# Altium PCB LED.PcbDoc
Units mm, origin at the board's own origin, x right, y up, seen from the top; angles counter-clockwise.
Board outline 18 x 18.5 mm, 2 copper layers (Top Layer, Bottom Layer), stack 1.671 mm thick; 5 components, 4 nets, 10 pads, 1 vias.
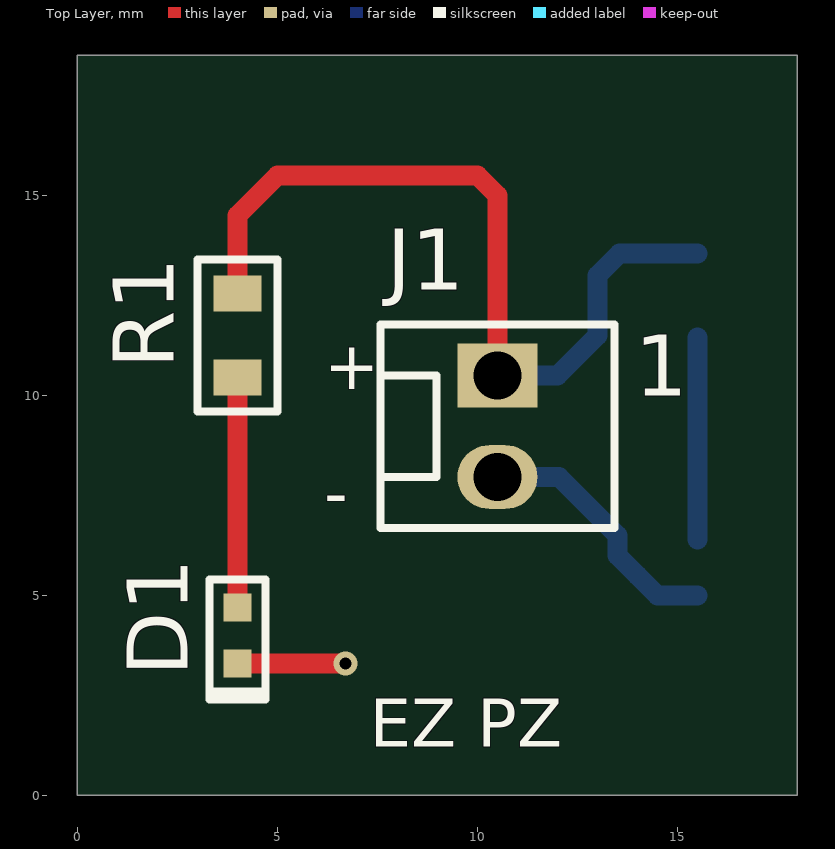
[diagram p0: Top Layer view]
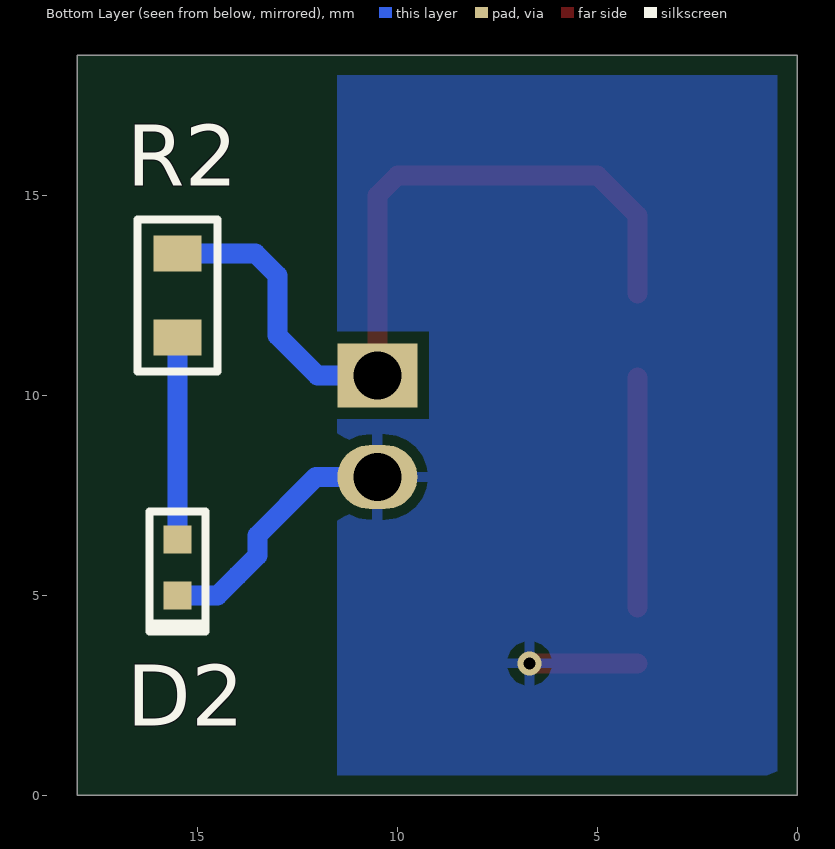
[diagram p1: Bottom Layer view, seen from below]
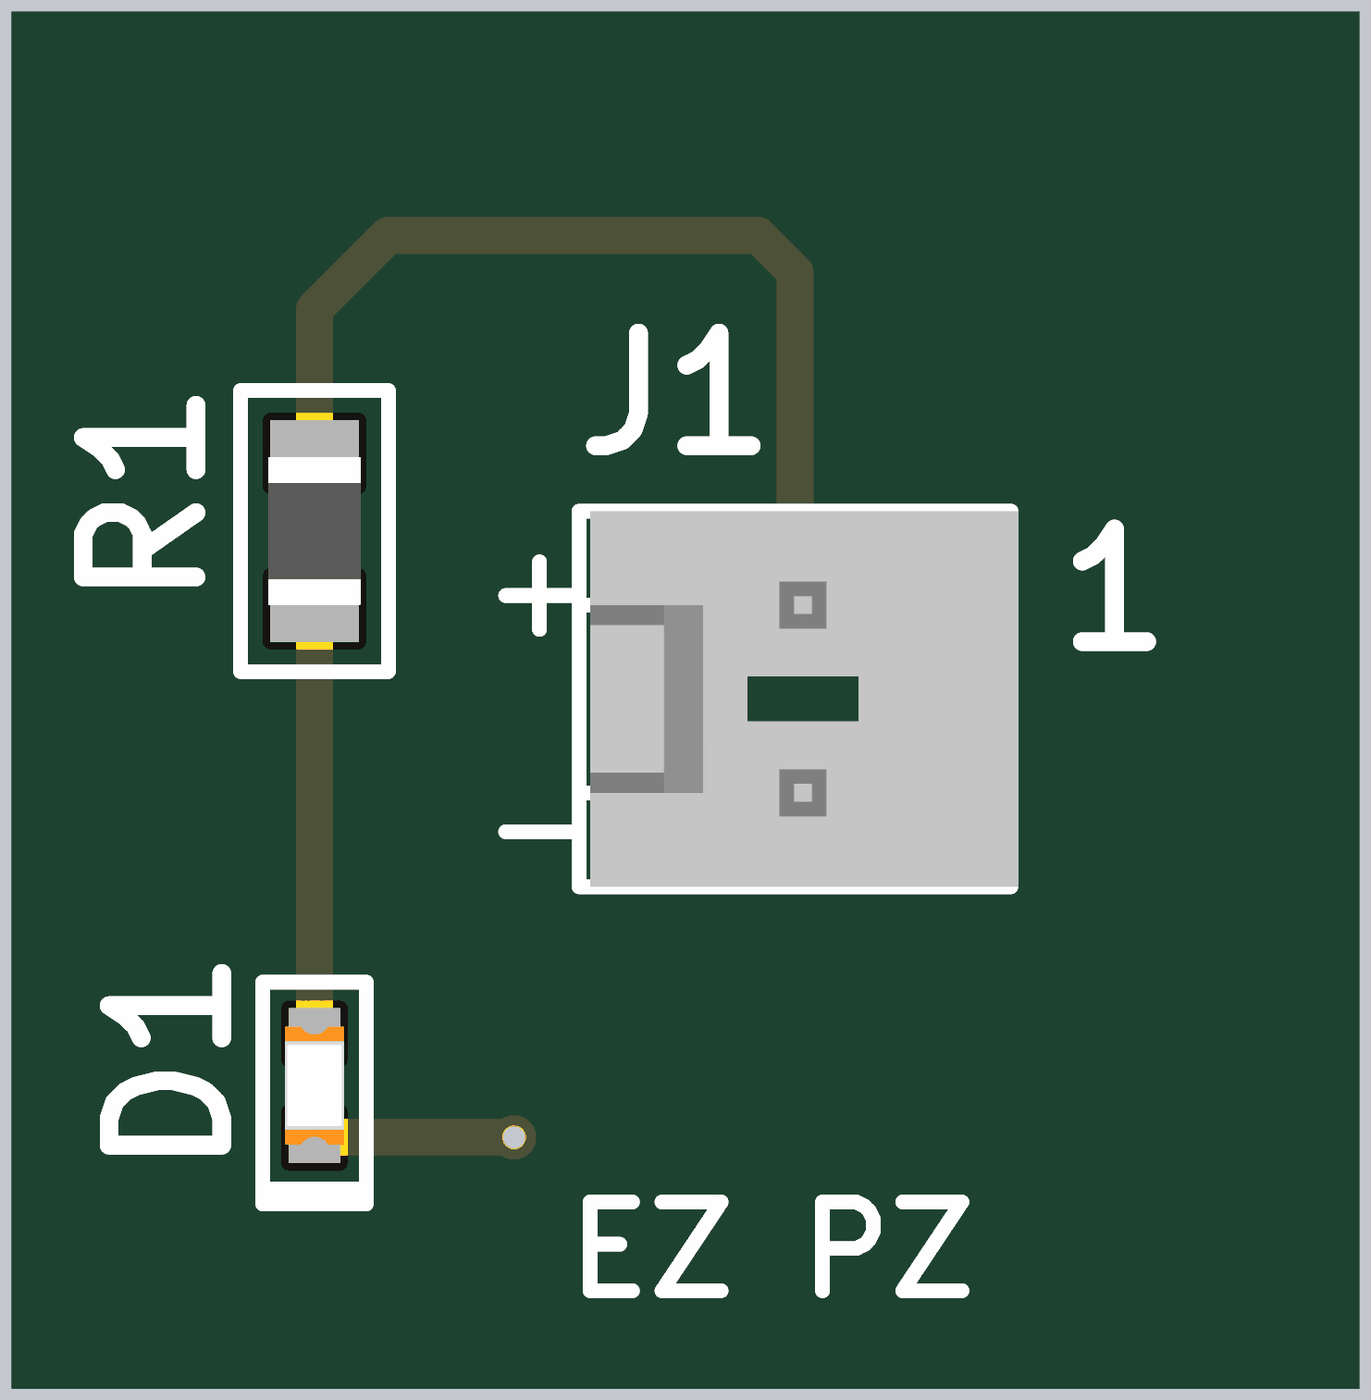
[diagram p2: 3D render of the assembled board from above, using the file's embedded part models]

## Layer stack, top to bottom
Top Solder: solder mask 0.0102, Solder Resist, Dk 3.5
Top Layer: signal copper 0.0356
Dielectric 1: dielectric 1.6, FR-4, Dk 4.8
Bottom Layer: signal copper 0.0356
Bottom Solder: solder mask 0.0102, Solder Resist, Dk 3.5

## Board outline
0,0 18,0 18,18.5 0,18.5

## Design rules (kind name [scope] priority, off if disabled: settings)
Clearance [All] p1: gap=0.3 ignorepadtopadclearanceinfootprint=FALSE
PolygonConnect [All] p1: connectstyle=Relief reliefconductorwidth=0.254 reliefentries=4 polygonreliefangle="90 Angle" airgapwidth=0.254
RoutingVias [All] p1: holewidth=0.3 width=0.6 viastyle="Through Hole" minholewidth=0.3 minwidth=0.6 maxholewidth=0.3 maxwidth=0.6
SilkToSolderMaskClearance [IsPad] p1: minsilkscreentomaskgap=0.1 clearancetoexposedcopper=TRUE
SolderMaskExpansion [All] p1: expansion=0.102 istentingtop=FALSE
SupplyNets "Schematic Supply Nets_1" [InNet('GND')] p1: voltage=0.000
SupplyNets "Schematic Supply Nets" [InNet('+3V3')] p2: voltage=0.000
Width [All] p1: maxlimit=1 minlimit=0.3 preferedwidth=0.5
29 further rules are at their usual default settings.

## Components (designator, comment, footprint, x,y, rotation, side; value= is the part's Value field where it differs from the comment)
D1 "GREEN" LED0603G 4,4 r90 top
D2 "GREEN" LED0603G 15.5,5.7 r90 bottom
J1 "1x2 Header" HDR1x2 10.5,10.5 r0 top
R1 "360R" R0805 4,11.5 r90 top
R2 "360R" R0805 15.5,12.5 r90 bottom

## Footprints (in the part's own frame and the unit in brackets; to place one, negate y for a bottom-side part, rotate by r counter-clockwise, add the part's x,y. Pads: shape width x height; smd on the part's side, far side on the other; paste and mask are expansions set on the pad)
HDR1x2 [mm]
  rect 2x1.6 hole 1.2: 1(0,0)
  oval 2x1.6 hole 1.2: 2(0,-2.54)
  silkscreen extent -2.92,-3.81 2.92,1.27, body extent -2.77,-3.81 3.03,1.27, height 11.07
LED0603G [mm]
  rect 0.7x0.7 smd: 1(-0.7,0) 2(0.7,0)
  silkscreen extent -1.6,-0.7 1.4,0.7, body extent -0.8,-0.4 0.8,0.4, height 0.59
R0805 [mm]
  rect 0.9x1.2 smd: 1(-1.05,0) 2(1.05,0)
  silkscreen extent -1.9,-1 1.9,1, body extent -1,-0.63 1,0.63, height 0.61

## Part data
D1 D2: library part LSM0603453V, "Green 572nm LED Indication - Discrete 2V 0603 (1608 Metric)", Manufacturer="Visual Communications", Supplier Part Number=LSM0603453VDKR-ND, Category=LEDs, ComponentLink1Description=https://datasheet.ciiva.com:443/pdfs/VipMasterIC/IC/VISU/VISU-S-A0009188582/VISU-S-A0009188582-1.pdf?src-supplier=IHS+Markit, ComponentLink1URL=https://datasheet.ciiva.com:443/pdfs/VipMasterIC/IC/VISU/VISU-S-A0009188582/VISU-S-A0009188582-1.pdf?src-supplier=IHS+Markit, ComponentLink2Description=http://www.farnell.com/datasheets/2699708.pdf?src-supplier=Farnell, ComponentLink2URL=http://www.farnell.com/datasheets/2699708.pdf?src-supplier=Farnell, ComponentLink3Description=http://www.farnell.com/datasheets/2699708.pdf?src-supplier=Newark, ComponentLink3URL=http://www.farnell.com/datasheets/2699708.pdf?src-supplier=Newark, ComponentLink4Description=https://vcclite.com/wp-content/uploads/wpallimport/files/files/LSM0603453V.pdf?src-supplier=Digikey, ComponentLink4URL=https://vcclite.com/wp-content/uploads/wpallimport/files/files/LSM0603453V.pdf?src-supplier=Digikey, Manufacturer Part Number=LSM0603453V, Optoelectronic Device Type="SINGLE COLOR LED", Pricing="1=0.5, 10=0.28, 100=0.1239, 500=0.1102, 1000=0.1071 (USD)", Reach SVHC Compliant=Yes, RoHS=Yes, RoHS Compliant=Yes, Stock=23593, Supplier=Digikey
J1: library part 22-27-2021, "CONN HEADER VERT 2POS 2.54MM", Contact Resistance=10mR, Flammability Rating="UL94 V-0", Insulation Color=White, Insulation Resistance=1GR, Manufacturer=Molex, Max Operating Temperature=75°C, Min Operating Temperature=0°C, Rated Current (Signal)=4A, Supplier Part Number=WM4111-ND, Body Breadth=0.23inch, Body Depth=0.46inch, Body Length=0.2inch, Body/Shell Style=RECEPTACLE, Category="Headers and Wire Housings", ComponentLink1Description=https://datasheet.ciiva.com:443/pdfs/VipMasterIC/IC/MOLE/MOLE-E-A0003552261/MOLE-S-A0003534498-1.pdf?src-supplier=IHS+Markit, ComponentLink1URL=https://datasheet.ciiva.com:443/pdfs/VipMasterIC/IC/MOLE/MOLE-E-A0003552261/MOLE-S-A0003534498-1.pdf?src-supplier=IHS+Markit, ComponentLink2Description=https://datasheet.ciiva.com/15217/getdatasheetpartid-163454-15217683.pdf?src-supplier=Verical, ComponentLink2URL=https://datasheet.ciiva.com/15217/getdatasheetpartid-163454-15217683.pdf?src-supplier=Verical, ComponentLink3Description=https://datasheet.ciiva.com/9468/0022272021-pcb-headers-9468403.pdf?src-supplier=Avnet, ComponentLink3URL=https://datasheet.ciiva.com/9468/0022272021-pcb-headers-9468403.pdf?src-supplier=Avnet, Connector Type="BOARD CONNECTOR", Contact Finish - Mating="NOT SPECIFIED", Contact Finish - Termination="Bright Tin (Sn)", Contact Gender=Male, Contact Material=Brass, Contact Pattern=RECTANGULAR, Contact Style="SQ PIN-SKT", DIN Conformance=No, Durability=25Cycles, Filter Feature=No, IEC Conformance=No, Insulation Material=Nylon, JESD-609 Code=e3, Manufacturer Part Number=22-27-2021, Mating Contact Pitch=0.1inch, Mating Information="MULTIPLE MATING PARTS AVAILABLE", MIL Conformance=No, Mixed Contacts=No, Mounting Option 1=LOCKING, Mounting Style=STRAIGHT, Mounting Technology=Board, Number Of Connectors=1, Number of Contacts=2, Number Of PCB Rows=1, Number of Rows Loaded=1, Option="General Purpose", PCB Contact Pattern=RECTANGULAR, Plating Thickness=100uin, Polarization Key="POLARIZED HOUSING", Pricing="1=0.24, 10=0.208, 100=0.1765, 500=0.1575, 2850=0.13928, 5700=0.13263, 11400=0.1263 (USD)", Reach SVHC Compliant=Yes, Reference Standard=UL, Reliability=COMMERCIAL, RoHS=Yes, RoHS Compliant=Yes, Stock=475, Supplier=Digikey, Terminal Length=0.14inch, Terminal Pitch=2.54mm, Termination=Solder
R1 R2: library part AC0805FR-07360RL, "RES SMD 360 OHM 1% 1/8W 0805", Case/Package=0805, Manufacturer=Yageo, Max Operating Temperature=155°C, Min Operating Temperature=-55°C, Package Height=0.5mm, Package Length=2mm, Package Shape=Rectangular, Package Width=1.25mm, Power=125mW, Rated Temperature=70°C, Resistor Type="FIXED RESISTOR", Supplier Part Number=13-AC0805FR-07360RLCT-ND, Temperature Coefficient (ppm/Cel)=100, Tolerance=1%, Working Voltage=150V, Additional Feature="LASER TRIMMABLE", Category="Chip SMD Resistors", ComponentLink1Description=https://datasheet.ciiva.com:443/pdfs/VipMasterIC/IC/YAGO/YAGO-S-A0003597364/YAGO-S-A0003597364-1.pdf?src-supplier=IHS+Markit, ComponentLink1URL=https://datasheet.ciiva.com:443/pdfs/VipMasterIC/IC/YAGO/YAGO-S-A0003597364/YAGO-S-A0003597364-1.pdf?src-supplier=IHS+Markit, ComponentLink2Description=http://www.yageo.com/NewPortal/yageodocoutput?fileName=/pdf/R-Chip/PYu-AC_51_RoHS_L_6.pdf&src-supplier=Digikey, ComponentLink2URL=http://www.yageo.com/NewPortal/yageodocoutput?fileName=/pdf/R-Chip/PYu-AC_51_RoHS_L_6.pdf&src-supplier=Digikey, ComponentLink3Description=https://datasheet.octopart.com/AC0805FR-07360RL-Yageo-datasheet-178509465.pdf?src-supplier=Newark, ComponentLink3URL=https://datasheet.octopart.com/AC0805FR-07360RL-Yageo-datasheet-178509465.pdf?src-supplier=Newark, Construction=Chip, JESD-609 Code=e3, Manufacturer Part Number=AC0805FR-07360RL, Mounting Technology="Surface Mount", Packaging="Tape and Reel", Pins=2, Pricing="1=0.1, 10=0.016, 100=0.0133, 1000=0.01224 (USD)", Reach SVHC Compliant=Yes, Reference Standard=AEC-Q200, RoHS=Yes, RoHS Compliant=Yes, Stock=9830, Supplier=Digikey, Technology="METAL GLAZE/THICK FILM", Terminal Finish=Nickel, Termination=Wraparound

## Via types
v1: diameter 0.6, hole 0.3, Top Layer to Bottom Layer, tented both sides, 1 vias

## Nets (pads, with @x,y where several pads share a name; then routed paths per layer and width w, separated by ;. In a path a pad name is that pad's centre, name@x,y a point inside that pad or via, vN(x,y) a via of type N, cw(c..) or ccw(c..) an arc to the next point about the centre after c; other vN are vias at no path point)
+3V3: J1.1 R1.2 R2.2 | length 20.7
  Top Layer w0.5: R1.2 4,14.5 5,15.5 10,15.5 10.5,15 J1.1
  Bottom Layer w0.5: J1.1 12,10.5 13,11.5 13,13 13.55,13.55 R2.2
DIODE1: D1.2 R1.1 | length 5.7
  Top Layer w0.5: D1.2 R1.1
DIODE2: D2.2 R2.1 | length 5.1
  Bottom Layer w0.5: D2.2 R2.1
GND: D1.1 D2.1 J1.2 | length 9.2
  Top Layer w0.5: D1.1 v1(6.7,3.3)
  Bottom Layer w0.5: J1.2 12.04,7.96 13.5,6.5 13.5,6 14,5.5 14.5,5 D2.1

## Polygon pours and split planes (outlines as drawn)
GND on Bottom Layer "GND_L02_P000" (solid, pour order 0): 0.46,0.638 0.598,0.5 11.5,0.5 11.5,18 0.5,18 0.5,0.5

## Silkscreen, mask and mechanical layers (free items; w line width, h text height)
Top Overlay:
  text "+" at 6.169,10.16 h1.2
  text "-" at 6.169,6.966 h1.2
  text "EZ PZ" at 7.312,1.216 h1.2
Board:
  lines w0.2: 0,0 0,18.288 0.127,18.415 18.034,18.415 18.034,0 0,0

## Text inside footprints (layer, text, board x,y; h text height)
J1: Top Overlay "1" at 13.929,9.992 h1.52